# Altium PCB pcbChaves.PcbDoc
Units mm, origin at the board's own origin, x right, y up, seen from the top; angles counter-clockwise.
Board outline 76.96 x 33.4 mm, 2 copper layers (Top Layer, Bottom Layer); 36 components, 91 nets, 82 pads, 0 vias.
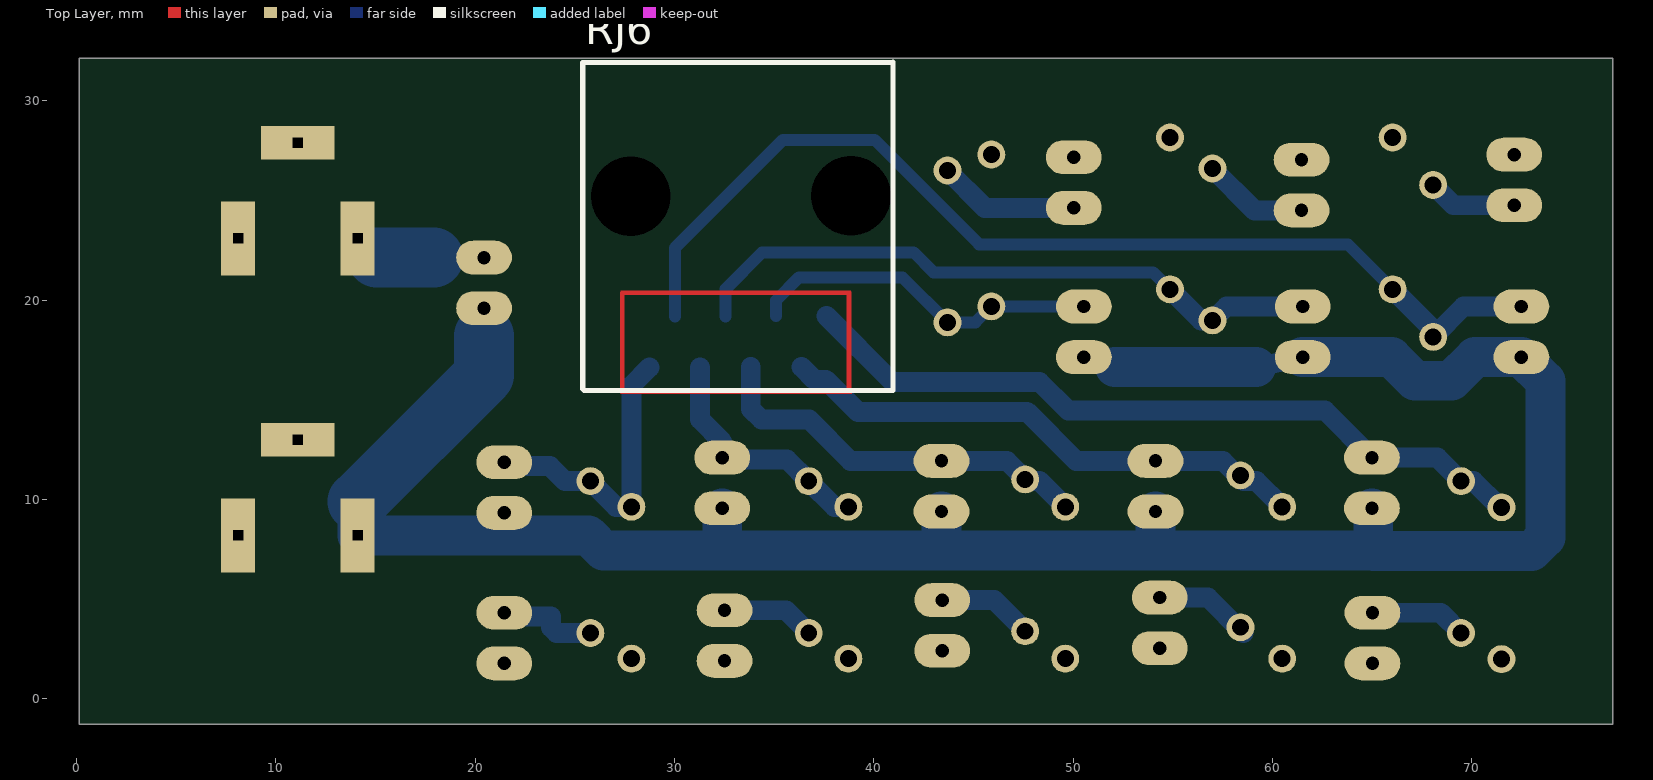
[diagram p0: Top Layer view]
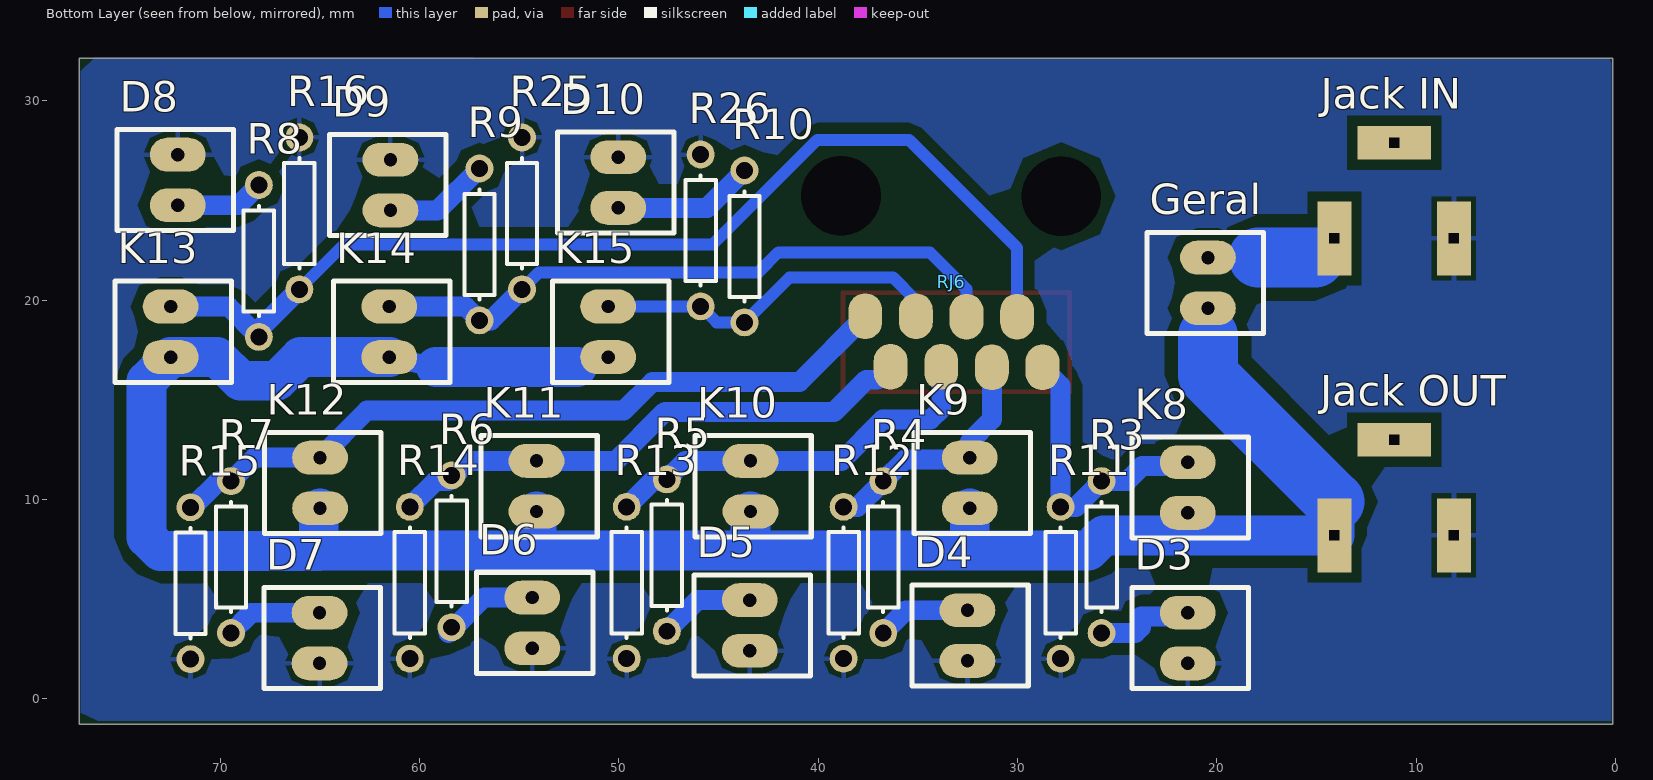
[diagram p1: Bottom Layer view, seen from below]
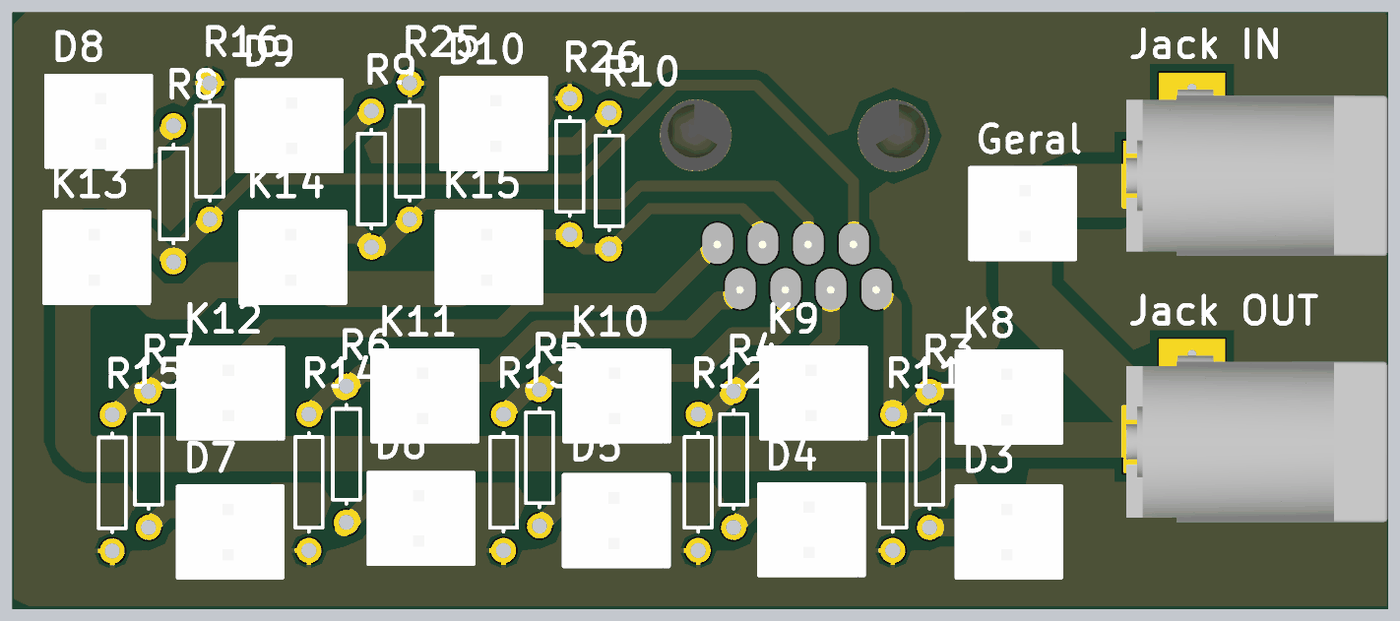
[diagram p2: 3D render of the assembled board from below, using the file's embedded part models]

## Layer stack, top to bottom
Top Solder: solder mask 0.0102, Solder Resist, Dk 3.5
Top Layer: signal copper 0.0356
Dielectric 1: dielectric 0.32, FR-4, Dk 4.8
Bottom Layer: signal copper 0.0356
Bottom Solder: solder mask 0.0102, Solder Resist, Dk 3.5

## Board outline
0.127,-1.27 77.089,-1.27 77.089,32.131 0.127,32.131

## Design rules (kind name [scope] priority, off if disabled: settings)
Clearance [All] p1: gap=0.5 ignorepadtopadclearanceinfootprint=FALSE
PolygonConnect [All] p1: connectstyle=Relief reliefconductorwidth=0.254 reliefentries=4 polygonreliefangle="90 Angle" airgapwidth=0.254
RoutingVias [All] p1: holewidth=0.711 width=1.27 viastyle="Through Hole" minholewidth=0.711 minwidth=1.27 maxholewidth=0.711 maxwidth=1.27
SolderMaskExpansion [All] p1: expansion=0.102
Width [All] p1: maxlimit=3 minlimit=0.254 preferedwidth=1
30 further rules are at their usual default settings.

## Components (designator, comment, footprint, x,y, rotation, side; value= is the part's Value field where it differs from the comment)
D3 "LED2" 2-vias 21.463,3.048 r180 bottom
D4 "LED2" 2-vias 32.512,3.175 r180 bottom
D5 "LED2" 2-vias 43.434,3.683 r180 bottom
D6 "LED2" 2-vias 54.356,3.81 r180 bottom
D7 "LED2" 2-vias 65.024,3.048 r180 bottom
D8 "LED2" 2-vias 72.136,26.035 r0 bottom
D9 "LED2" 2-vias 61.468,25.781 r0 bottom
D10 "LED2" 2-vias 50.038,25.908 r0 bottom
Geral "KK2" 2-vias 20.446,20.87 r0 bottom
"Jack IN" "Jack" "JACK J4" 8.1,23.1 r0 bottom
"Jack OUT" "Jack" "JACK J4" 8.1,8.2 r0 bottom
K8 "KK2" 2-vias 21.463,10.6 r180 bottom
K9 "KK2" 2-vias 32.4,10.83 r180 bottom
K10 "KK2" 2-vias 43.4,10.668 r180 bottom
K11 "KK2" 2-vias 54.138,10.668 r180 bottom
K12 "KK2" 2-vias 65,10.83 r180 bottom
K13 "KK2" 2-vias 72.499,18.415 r180 bottom
K14 "KK2" 2-vias 61.522,18.415 r180 bottom
K15 "KK2" 2-vias 50.546,18.415 r180 bottom
R3 "Res1" AXIAL-0.3 25.781,7.112 r90 bottom value=1K
R4 "Res1" AXIAL-0.3 36.739,7.112 r90 bottom value=1K
R5 "Res1" AXIAL-0.3 47.6,7.2 r90 bottom value=1K
R6 "Res1" AXIAL-0.3 58.4,7.4 r90 bottom value=1K
R7 "Res1" AXIAL-0.3 69.469,7.112 r90 bottom value=1K
R8 "Res1" AXIAL-0.3 68.072,21.971 r270 bottom value=1K
R9 "Res1" AXIAL-0.3 57,22.8 r270 bottom value=1K
R10 "Res1" AXIAL-0.3 43.7,22.7 r270 bottom value=1K
R11 "Res1" AXIAL-0.3 27.84,5.825 r90 bottom value=1K
R12 "Res1" AXIAL-0.3 38.726,5.825 r90 bottom value=1K
R13 "Res1" AXIAL-0.3 49.611,5.825 r90 bottom value=1K
R14 "Res1" AXIAL-0.3 60.497,5.825 r90 bottom value=1K
R15 "Res1" AXIAL-0.3 71.5,5.8 r90 bottom value=1K
R16 "Res1" AXIAL-0.3 66.04,24.358 r270 bottom value=1K
R25 "Res1" AXIAL-0.3 54.864,24.358 r270 bottom value=1K
R26 "Res1" AXIAL-0.3 45.9,23.5 r270 bottom value=1K
RJ6 "RJ45" RJ45_90 28.496,28.293 r0 top locked

## Footprints (in the part's own frame and the unit in brackets; to place one, negate y for a bottom-side part, rotate by r counter-clockwise, add the part's x,y. Pads: shape width x height; smd on the part's side, far side on the other; paste and mask are expansions set on the pad)
2-vias [mm]
  oval 2.8x1.7 hole 0.67 unplated: 1(0,1.27) 2(0,-1.27)
  silkscreen extent -2.79,-2.54 3.05,2.54, body extent -2.87,-2.54 2.97,2.54, height 11.7
AXIAL-0.3 [mm] "Axial Device, Thru-Hole; 2 Leads; 0.3 in Pin Spacing"
  round 1.4 hole 0.85: 1(-3.81,0) 2(3.81,0)
  silkscreen extent -2.77,-0.76 2.77,0.76
"JACK J4" [mm]
  rect 1.7x3.7 hole 0.5 square: 1(6,0) 2(0,0)
  rect 3.7x1.7 hole 0.5 square: 3(3,-4.8)
  body extent -7.94,-4.71 6.68,4.61, height 11
RJ45_90 [mil]
  oval 66.93x90.55 smd far side: 1(360,-358) 2(310,-458) 3(260,-358) 4(210,-458) 5(160,-359) 6(110,-459) 7(60,-359) 8(10,-459)
  round 60 hole 157.48: HOLE(-27.4,-121) HOLE(408.03,-120)
  Top Layer region: -48,-311 -48,-510 -40,-510 -40,-311
  Top Layer region: -47,-503.03 -47,-511.01 409,-511.02 409,-502.98
  Top Layer region: 400,-310 400,-509 408,-509 408,-310
  Top Layer region: -47,-308.02 -47,-316 407,-316.01 407,-307.97
  silkscreen extent -122,-505 491,144, body extent -119,-505 491,145, height 630

## Part data
D3 D4 D5 D6 D7 D8 D9 D10: "Typical RED, GREEN, YELLOW, AMBER GaAs LED", LatestRevisionDate=17-Jul-2002, LatestRevisionNote="Re-released for DXP Platform.", PackageDescription="SM LED; 2 Flat Leads", PackageReference=3.2X1.6X1.1, PackageVersion=Feb-2002, Published=8-Jun-2000, Publisher="Altium Limited"
Geral K8 K9 K10 K11 K12 K13 K14 K15: library part KK2Vias
R3 R4 R5 R6 R7 R8 R9 R10 R11 R12 R13 R14 R15 R16 R25 R26: "Resistor", LatestRevisionDate=17-Jul-2002, LatestRevisionNote="Re-released for DXP Platform.", PackageDescription="Axial Device, Thru-Hole; 2 Leads; 0.3 in Pin Spacing", PackageReference=AXIAL-0.3, Published=8-Jun-2000, Publisher="Altium Limited"
RJ6: library part RJ45_90

## Nets (pads, with @x,y where several pads share a name; then routed paths per layer and width w, separated by ;. In a path a pad name is that pad's centre, name@x,y a point inside that pad or via, vN(x,y) a via of type N, cw(c..) or ccw(c..) an arc to the next point about the centre after c; other vN are vias at no path point)
1A_M1: 
1A_M2: 
1B_M1: 
1B_M2: 
2A_M1: 
2A_M2: 
2B_M1: 
2B_M2: 
3VCC: 
5V: 
5VCC: 
12V: "Jack OUT.1" Geral.1 K8.2 K9.2 K10.2 K11.2 K12.2 K13.2 K14.2 K15.2 | length 113.7
  Bottom Layer w1: K15.2 52.099,16.645 ; 59.177,16.645 K14.2
  Bottom Layer w2: 14.1,9.9 14.1,8.2 25.675,8.2 26.44,7.435 32.4,7.435 ; K9.2 32.4,7.435 ; K10.2 43.4,7.535 43.3,7.435 ; 52.099,16.645 59.177,16.645 ; K11.2 54.138,7.473 54.1,7.435 ; K14.2 65.977,17.145 67.161,15.961 68.983,15.961 70.167,17.145 K13.2 73.7,15.944 73.7,8.1 73.01,7.41 65.09,7.41 65.065,7.435 ; K12.2 65.065,9.495 65.065,7.435 ; 32.4,7.435 43.3,7.435 ; 43.3,7.435 54.1,7.435 ; 54.1,7.435 65.065,7.435
  Bottom Layer w3: 14.1,9.9 20.446,16.246 20.446,18.2
ChA_1: 
ChA_2: 
ChA_3: 
ChB_1: 
ChB_2: 
ChB_3: 
DIR_M1: 
DIR_M2: 
Eletro1: 
Eletro2: 
GND: "Jack IN.2" "Jack OUT.2" D3.2 D4.2 D5.2 D6.2 D7.2 D8.2 D9.2 D10.2 R11.1 R12.1 R13.1 R14.1 R15.1 R16.1 R25.1 R26.1
GND_MOT: 
MISO: 
MISO_D12: 
MOSI: 
MOSI_D11: 
MS1: 
MS2: 
MS3: 
NetC3_2: 
NetC4_1: 
NetChaveEN_1: 
NetD1_1: 
NetD2_1: 
NetD3_1: D3.1 R3.1 | length 5.1
  Bottom Layer w1: D3.1 21.653,4.128 23.812,4.128 23.812,3.574 24.084,3.302 R3.1
NetD4_1: D4.1 R4.1 | length 4.7
  Bottom Layer w1: D4.1 35.596,4.445 R4.1
NetD5_1: D5.1 R5.1 | length 4.9
  Bottom Layer w1: D5.1 46.047,4.953 R5.1@47.698,3.302
NetD6_1: D6.1 R6.1 | length 4.9
  Bottom Layer w1: D6.1 56.769,5.08 R6.1@58.547,3.302
NetD7_1: D7.1 R7.1 | length 4.9
  Bottom Layer w1: D7.1 68.453,4.318 R7.1
NetD8_1: D8.1 R8.1 | length 4.5
  Bottom Layer w1: R8.1 69.088,24.765 D8.1
NetD9_1: D9.1 R9.1 | length 5.3
  Bottom Layer w1: R9.1 59.099,24.511 D9.1
NetD10_1: D10.1 R10.1 | length 7.1
  Bottom Layer w1: R10.1 45.572,24.638 D10.1
NetEncoder_6_2: 
NetEncoder_6_3: 
NetGeral_2: "Jack IN.1" Geral.2 | length 6.7
  Bottom Layer w1: 14.1,23.1 15.06,22.14 ; 17.926,22.14 Geral.2
  Bottom Layer w3: 15.06,22.14 17.926,22.14
NetK8_1: K8.1 R3.2 R11.2 RJ6.8 | length 14.7
  Bottom Layer w1: K8.1 21.653,11.68 23.744,11.68 24.502,10.922 R3.2 27.068,9.635 R11.2 27.84,15.725 RJ6.8
NetK9_1: K9.1 R4.2 R12.2 RJ6.6 | length 12.3
  Bottom Layer w1: RJ6.6 31.29,14.01 32.4,12.9 K9.1 32.49,12.01 35.651,12.01 R4.2 38.026,9.635 R12.2
NetK10_1: K10.1 R5.2 R13.2 RJ6.4 | length 19.9
  Bottom Layer w1: RJ6.4 33.83,14.543 34.363,14.01 36.763,14.01 38.835,11.938 K10.1 46.682,11.938 47.698,10.922 48.324,10.922 R13.2
NetK11_1: K11.1 R6.2 R14.2 RJ6.2 | length 27
  Bottom Layer w1: RJ6.2 37.02,16.01 37.591,16.01 39.201,14.4 47.7,14.4 50.162,11.938 K11.1 57.531,11.938 58.547,10.922 59.21,10.922 R14.2
NetK12_1: K12.1 R7.2 R15.2 RJ6.1 | length 37.8
  Bottom Layer w1: RJ6.1 40.94,15.9 48.321,15.9 49.76,14.461 62.639,14.461 K12.1 68.291,12.1 R7.2 70.096,10.922 71.383,9.635 R15.2
NetK13_1: K13.1 R8.2 R16.2 RJ6.7 | length 53.1
  Bottom Layer w0.6: RJ6.7 30.02,22.62 35.445,28.045 40.043,28.045 45.289,22.8 63.788,22.8 R16.2
  Bottom Layer w1: R16.2 68.072,18.516 R8.2 69.596,19.685 K13.1
NetK14_1: K14.1 R9.2 R25.2 RJ6.5 | length 32.8
  Bottom Layer w0.6: RJ6.5 32.56,20.56 34.4,22.4 42,22.4 43,21.4 54.012,21.4 R25.2
  Bottom Layer w1: R25.2 56.422,18.99 R9.2 57.695,19.685 K14.1
NetK15_1: K15.1 R10.2 R26.2 RJ6.3 | length 18
  Bottom Layer w0.6: RJ6.3 35.1,20 36.25,21.15 41.44,21.15 R10.2 45.1,18.89 R26.2 45.905,19.685 K15.1
NetLDR_1_2_1: 
NetLDR_1_2_3: 
NetLDR_1_2_5: 
NetLDR_1_2_7: 
NetLDR_2_2_2: 
NetLDR_2_2_4: 
NetLDR_2_2_6: 
NetLDR_2_2_8: 
NetMatriz_1: 
NetMatriz_2: 
NetMatriz_3: 
NetNano_1_10: 
NetNano_2_18: 
NetNano_2_19: 
NetNano_2_20: 
NetNano_2_21: 
NetNano_2_22: 
RST_D: 
S0: 
S1: 
S3: 
SCK: 
Servo1: 
Servo2: 
Servo3: 
Servo4: 
SLEEP: 
SS: 
SS_D10: 
STP_M1: 
STP_M2: 
TCS_OUT_1: 
TCS_OUT_2: 
TCS_OUT_3: 
TCS_OUT_4: 
Vin: 
pads on no net: "Jack IN.3" "Jack OUT.3" RJ6.HOLE

## Polygon pours and split planes (outlines as drawn)
GND on Bottom Layer "GND_L01_P-001" (solid, remove dead copper, pour order 4): 0,32.1 0.2,31.9 0.2,-1.1 77.2,-1.1 77.3,-1 77,-0.7 77,32.2